# EAGLE board RESISTORS_C (EAGLE 4.09)

Size 160 x 100 mm. Coordinates in mm from the lower left corner, seen from the top.
Outline: 0,0 160,0 160,100 0,100 0,0
Copper layers used: 

## Footprints (pad centres in the part's own frame; a part is rotated, then mirrored left to right if it is on the bottom)
PW1_228MM_H = drill 0.889 round: P$1 -11.43,0; P$2 11.43,0
PW2_254MM_H = drill 0.889 round: P$1 -12.7,0; P$2 12.7,0
PW3_304MM_H = drill 0.889 round: P$1 -15.24,0; P$2 15.24,0
PW5_330MM_H = drill 0.889 round: P$1 -16.51,0; P$2 16.51,0
PW7_457MM_H = drill 0.889 round: P$1 -22.86,0; P$2 22.86,0
PW10_609MM_H = drill 0.889 round: P$1 -30.48,0; P$2 30.48,0
PW15_635MM_H = drill 0.889 round: P$1 -31.75,0; P$2 31.75,0
PW20_812MM_H = drill 0.889 round: P$1 -40.64,0; P$2 40.64,0
PW22_812MM_H = drill 0.889 round: P$1 -40.64,0; P$2 40.64,0
PW25_812MM_H = drill 0.889 round: P$1 -40.64,0; P$2 40.64,0

## Placement (x,y rotation side)
E$1  22.8 MM  [PW1_228MM_H]  14.6,95.72 0 top
E$2  25.4 MM  [PW2_254MM_H]  48.89,95.72 0 top
E$3  30.4 MM  [PW3_304MM_H]  86.99,95.72 0 top
E$4  33.0 MM  [PW5_330MM_H]  127.63,95.72 0 top
E$5  PW7_457MM_H  [PW7_457MM_H]  36.19,76.67 0 top
E$6  PW10_609MM_H  [PW10_609MM_H]  114.93,76.67 0 top
E$7  PW15_635MM_H  [PW15_635MM_H]  36.19,55.08 0 top
E$8  PW20_812MM_H  [PW20_812MM_H]  114.93,55.08 0 top
E$9  PW22_812MM_H  [PW22_812MM_H]  114.93,33.49 0 top
E$10  PW25_812MM_H  [PW25_812MM_H]  114.93,10.63 0 top

## Library data of the parts
E$1-E$10 = POVRAY